# EAGLE board BP.LCDadapter.v2a (EAGLE 5.10)
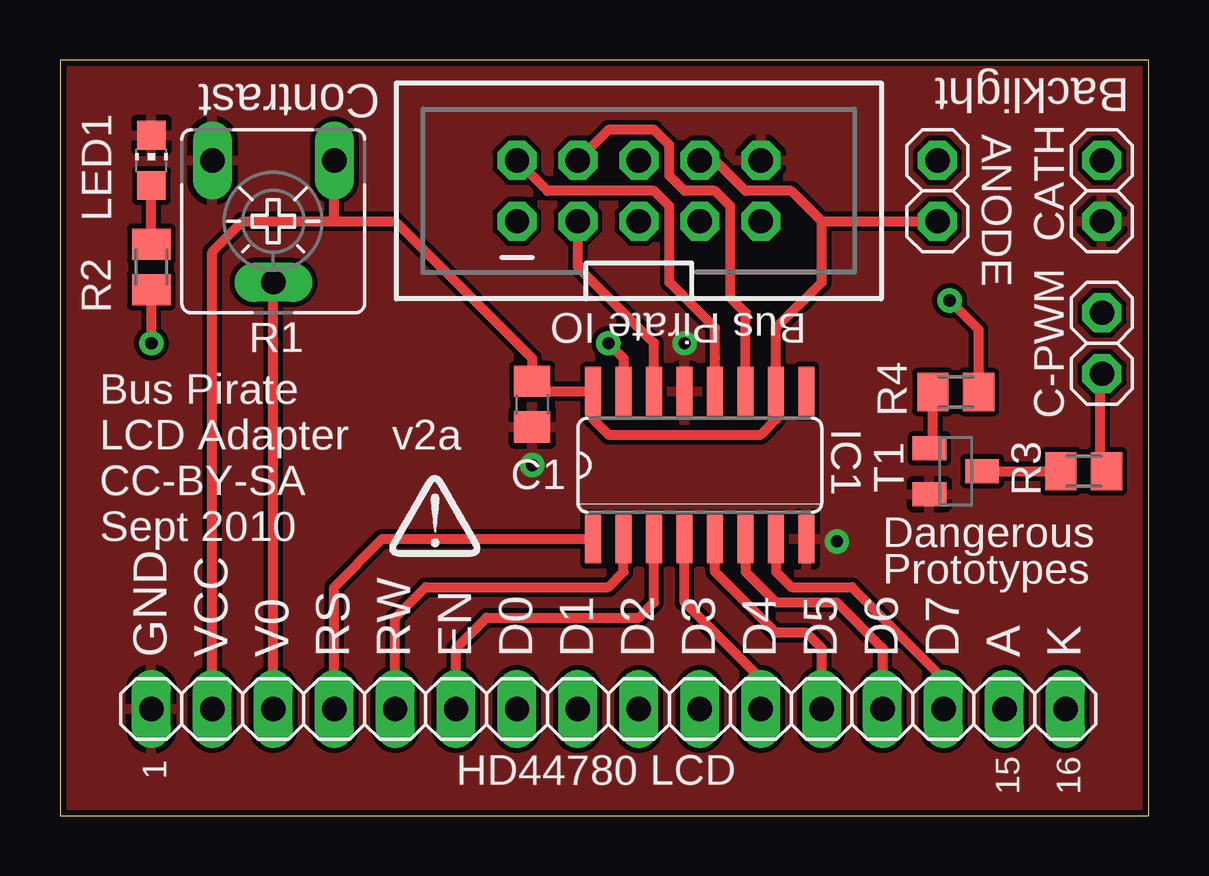
[diagram p0: board, top side]
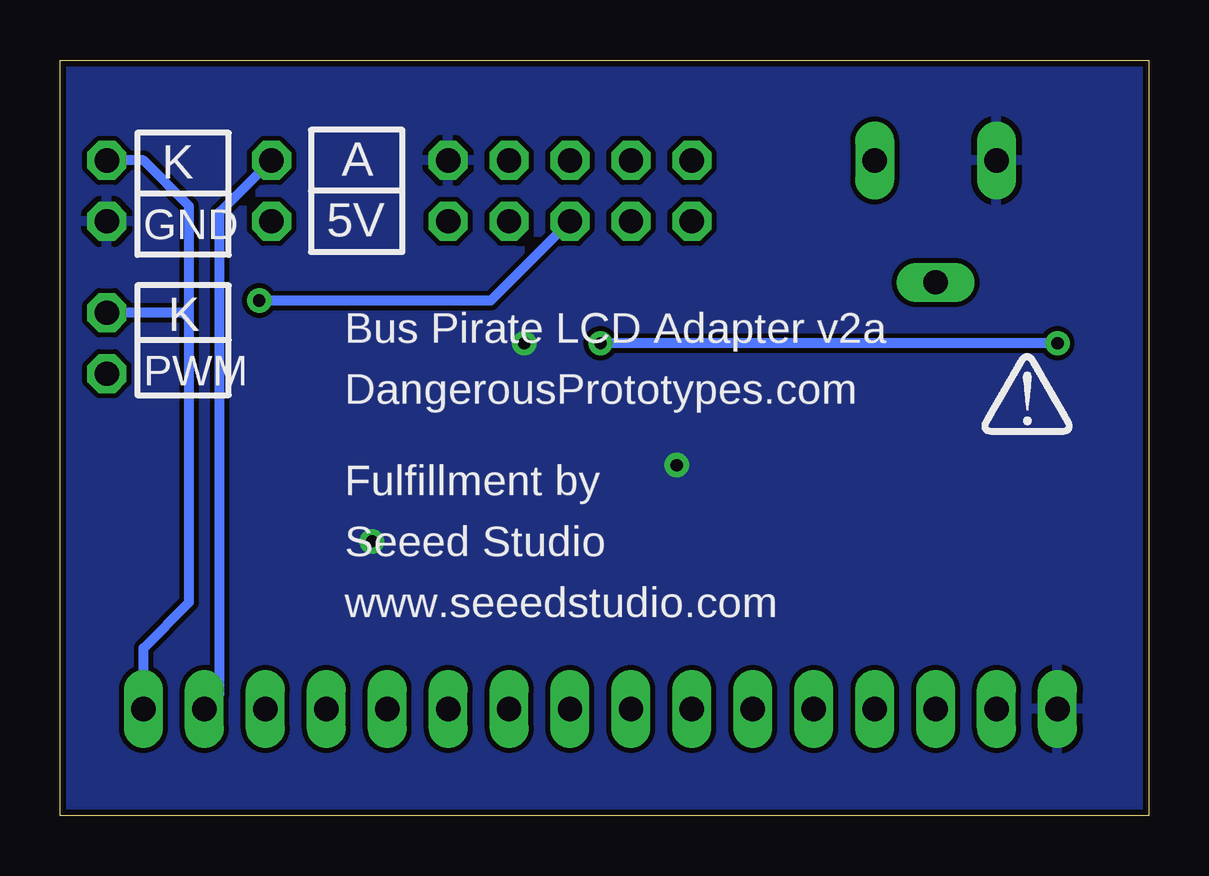
[diagram p1: board, bottom side, seen from below]

Size 45.39 x 31.49 mm. Coordinates in mm from the lower left corner, seen from the top.
Outline: 0,0 45.39,0 45.39,31.49 0,31.49 0,0
Copper layers (1*16): Top 0.035mm / dielectric 1.5mm / Bottom 0.035mm
Design rules "SparkFun": minimum track width 8mil, minimum drill 20mil, track to track 8mil, track to pad 8mil, pad to pad 8mil, via to via 8mil, smd to smd 8mil, copper to edge 10mil, drill to drill 8mil, minimum pad ring 12mil, minimum via ring 10mil, stop-mask expansion 4mil, vias tented up to drill 25mil, thermal gap 10mil

## Footprints (pad centres in the part's own frame; a part is rotated, then mirrored left to right if it is on the bottom)
1X02 = drill 1.016 octagon: 1 -1.27,0; 2 1.27,0
C0805 = smd 1.3 x 1.5: 1 -0.95,0; 2 0.95,0
SO16 = smd 0.66 x 2.032: 1 -4.445,-3.073; 2 -3.175,-3.073; 3 -1.905,-3.073; 4 -0.635,-3.073; 5 0.635,-3.073; 6 1.905,-3.073; 7 3.175,-3.073; 8 4.445,-3.073; 9 4.445,3.073; 10 3.175,3.073; 11 1.905,3.073; 12 0.635,3.073; 13 -0.635,3.073; 14 -1.905,3.073; 15 -3.175,3.073; 16 -4.445,3.073
2X5-SHROUDED = drill 1.016 octagon: 1 -1.27,5.08; 2 1.27,5.08; 3 -1.27,2.54; 4 1.27,2.54; 5 -1.27,0; 6 1.27,0; 7 -1.27,-2.54; 8 1.27,-2.54; 9 -1.27,-5.08; 10 1.27,-5.08
1X16 = drill 1.016 long: 1 -19.05,0; 2 -16.51,0; 3 -13.97,0; 4 -11.43,0; 5 -8.89,0; 6 -6.35,0; 7 -3.81,0; 8 -1.27,0; 9 1.27,0; 10 3.81,0; 11 6.35,0; 12 8.89,0; 13 11.43,0; 14 13.97,0; 15 16.51,0; 16 19.05,0
CHIP-LED0805 = smd 1.2 x 1.2: A 0,-1.05; C 0,1.05
CA6V = drill 1.016 long: A -2.54,-2.54; E 2.54,-2.54; S 0,2.54
M0805 = smd 1.3 x 1.6: 1 -0.95,0; 2 0.95,0
SOT23-BEC = smd 1 x 1.4: B -0.95,-1.1; C 0,1.1; E 0.95,-1.1

## Placement (x,y rotation side)
ANODE  [1X02]  36.58,26.04 90 top
C1  0.1uF  [C0805]  19.69,17.14 270 top
C-PWM  [1X02]  43.43,19.68 270 top
CATH  [1X02]  43.43,26.04 90 top
IC1  74HCT595D  [SO16]  26.67,14.61 0 top
JP1  M05X2SHD  [2X5-SHROUDED]  24.13,26.04 90 top
LCD  [1X16]  22.86,4.45 0 top
LED1  [CHIP-LED0805]  3.81,27.31 0 top
R1  10K  [CA6V]  8.89,24.77 180 top
R2  1K  [M0805]  3.81,22.86 270 top
R3  1K  [M0805]  42.67,14.35 180 top
R4  1K  [M0805]  37.34,17.65 0 top
T1  [SOT23-BEC]  37.34,14.35 270 top
U$1  [DP_LOGO]  15.62,11.43 0 top
U$2  [DP_LOGO]  5.08,16.51 0 bottom

## Library data of the parts
ANODE C-PWM CATH = pinhead - Copy
C1 R2-R4 = rcl
IC1 = 74xx-eu
JP1 = SparkFun
LCD = pinhead
LED1 = led
R1 = pot
T1 U$1 U$2 = dp_devices

## Nets
3V3: JP1.9
A: ANODE.2 LCD.15
ADC: JP1.7
AUX: JP1.5 R4.2
CLK: IC1.11 JP1.4
CS: IC1.12 JP1.2
D0: LCD.7
D01: LCD.8
D02: LCD.9
D03: LCD.10
D04: IC1.4 LCD.11
D05: IC1.5 LCD.12
D06: IC1.6 LCD.13
D07: IC1.7 LCD.14
EN: IC1.3 LCD.6
GND: C1.2 CATH.1 IC1.8 IC1.13 JP1.10 LCD.1 LED1.C R1.E T1.E
K: C-PWM.1 CATH.2 LCD.16
MISO: JP1.1
MOSI: IC1.14 JP1.3
N$1: IC1.15 R2.2
N$2: LED1.A R2.1
N$5: C-PWM.2 R3.1
N$6: R3.2 T1.C
N$7: LCD.3 R1.S
N$8: R4.1 T1.B
RS: IC1.1 LCD.4
RW: IC1.2 LCD.5
VCC: ANODE.1 C1.1 IC1.10 IC1.16 JP1.8 LCD.2 R1.A
VTARGET: JP1.6

## Tracks (layer width: path | path; a pad name or v marks a point on that pad's centre or on a via)
A
  Bottom 0.406: ANODE.2 38.73,25.15 38.73,5.08 LCD.15
AUX  (via drill 0.51)
  Top 0.406: 37.27,21.28 v37.08,21.46 38.29,20.26 R4.2
  Bottom 0.406: v37.08,21.46 27.43,21.46 JP1.5
CLK
  Top 0.406: JP1.4 22.86,28.57 24.77,28.57 25.4,27.94 25.4,26.67 26.03,26.04 27.3,26.04 27.94,25.4 27.94,21.59 28.57,20.96 IC1.11
CS
  Top 0.406: 27.3,19.05 IC1.12 27.3,20.32 25.4,22.22 25.4,25.4 24.77,26.04 20.32,26.04 JP1.2
D04
  Top 0.406: IC1.4 26.03,8.89 29.2,5.72 29.21,5.72 LCD.11
D05
  Top 0.406: 31.74,5.72 31.74,5.08 31.75,5.08 | IC1.5 27.3,10.16 29.84,7.62 31.12,7.62 31.75,6.99 31.75,5.08 | 31.75,5.08 LCD.12
D06
  Top 0.406: IC1.6 28.57,10.16 29.84,8.89 32.38,8.89 34.29,6.99 LCD.13
D07
  Top 0.406: IC1.7 29.84,10.16 30.48,9.53 33.02,9.53 36.83,5.71 LCD.14
EN
  Top 0.406: IC1.3 24.77,8.89 24.13,8.25 17.78,8.25 16.51,6.99 LCD.6
GND  (via drill 0.51)
  other vias: 26.03,19.68 32.38,11.43 19.69,14.61
  pour Bottom: 0,31.5 45.72,31.5 45.72,0 0,0
  pour Top: 0,31.5 45.72,31.5 45.72,0 0,0
K
  Bottom 0.406: CATH.2 41.91,27.31 40,25.4 40,20.7 | LCD.16 41.91,6.99 40,8.89 40,20.7 | C-PWM.1 40.26,20.96 40,20.7
MOSI
  Top 0.406: JP1.3 21.59,22.86 24.77,19.68 IC1.14
N$1  (via drill 0.51)
  Top 0.406: R2.2 v3.81,19.68 | v22.86,19.68 23.49,19.05 IC1.15
  Bottom 0.406: v3.81,19.68 v22.86,19.68
N$2
  Top 0.406: R2.1 LED1.A
N$5
  Top 0.406: R3.1 43.43,14.35 43.37,14.42 43.37,18.35 C-PWM.2
N$6
  Top 0.406: T1.C R3.2
N$7
  Top 0.406: R1.S 9.53,22.22 8.89,21.59 LCD.3
N$8
  Top 0.406: R4.1 36.39,15.45 T1.B
RS
  Top 0.406: IC1.1 13.44,11.53 11.43,9.53 LCD.4
RW
  Top 0.406: IC1.2 23.49,10.16 22.86,9.53 15.24,9.53 13.97,8.25 LCD.5
VCC
  Top 0.406: C1.1 20.1,17.68 IC1.16 22.23,16.51 22.86,15.88 29.21,15.88 29.84,16.51 IC1.10 29.84,20.32 31.75,22.22 31.75,24.77 | 11.43,24.77 R1.A | JP1.8 27.3,27.31 28.57,26.04 30.48,26.04 31.75,24.77 | 11.43,24.77 7.62,24.77 6.35,23.5 LCD.2 | C1.1 19.37,18.42 | C1.1 19.69,19.05 13.97,24.77 11.43,24.77 | 31.75,24.77 ANODE.1

## Text on the board
tNames: Contrast | Backlight | Bus Pirate IO | Bus Pirate | LCD Adapter | v2a | CC-BY-SA | Sept 2010 | Dangerous | Prototypes | GND | VCC | V0 | RS | RW | EN | D0 | D1 | D2 | D3 | D4 | D5 | D6 | D7 | A | K | 1 | HD44780 LCD | 15 | 16
bNames: A | K | 5V | GND | K | Bus Pirate LCD Adapter v2a | DangerousPrototypes.com | PWM | Fulfillment by | Seeed Studio | www.seeedstudio.com